# Altium PCB miniESP.PcbDoc
Units mm, origin at the board's own origin, x right, y up, seen from the top; angles counter-clockwise.
Board outline 26.67 x 37.46 mm, 2 copper layers (Top Layer, Bottom Layer); 16 components, 25 nets, 74 pads, 19 vias.
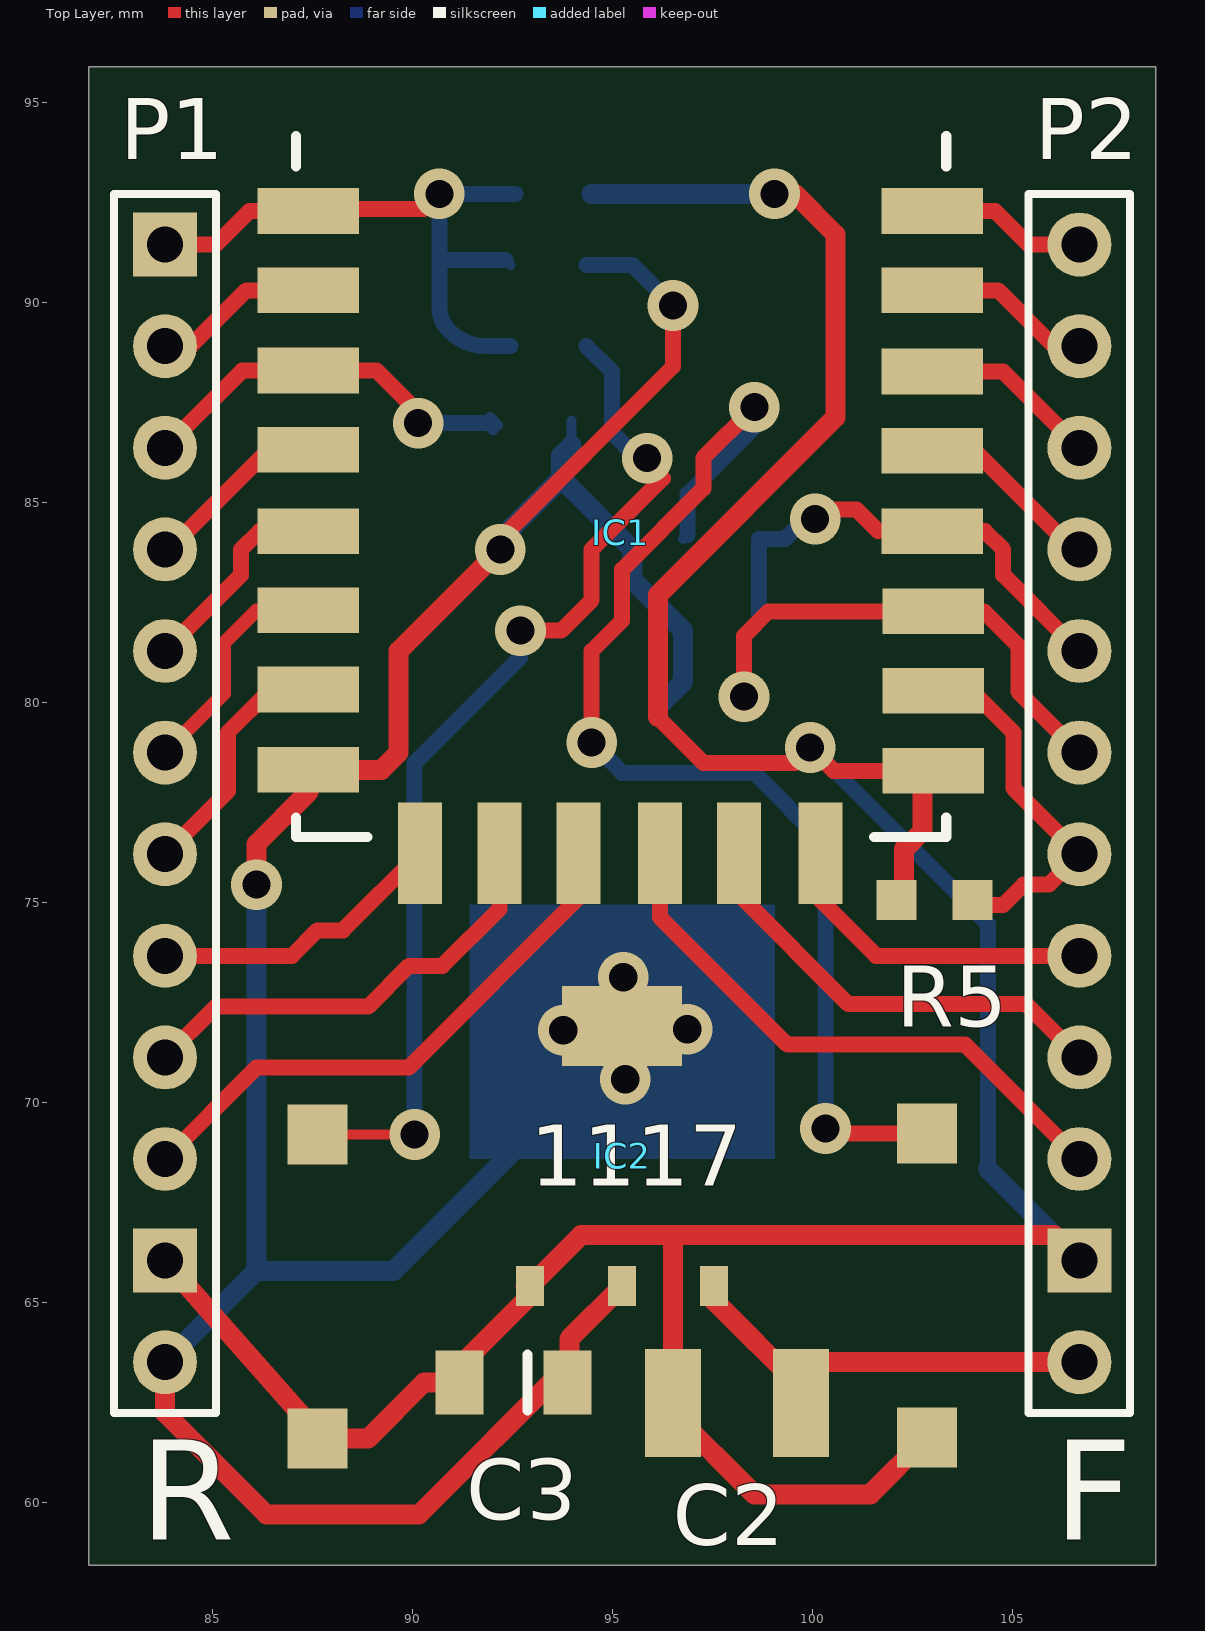
[diagram p0: Top Layer view]
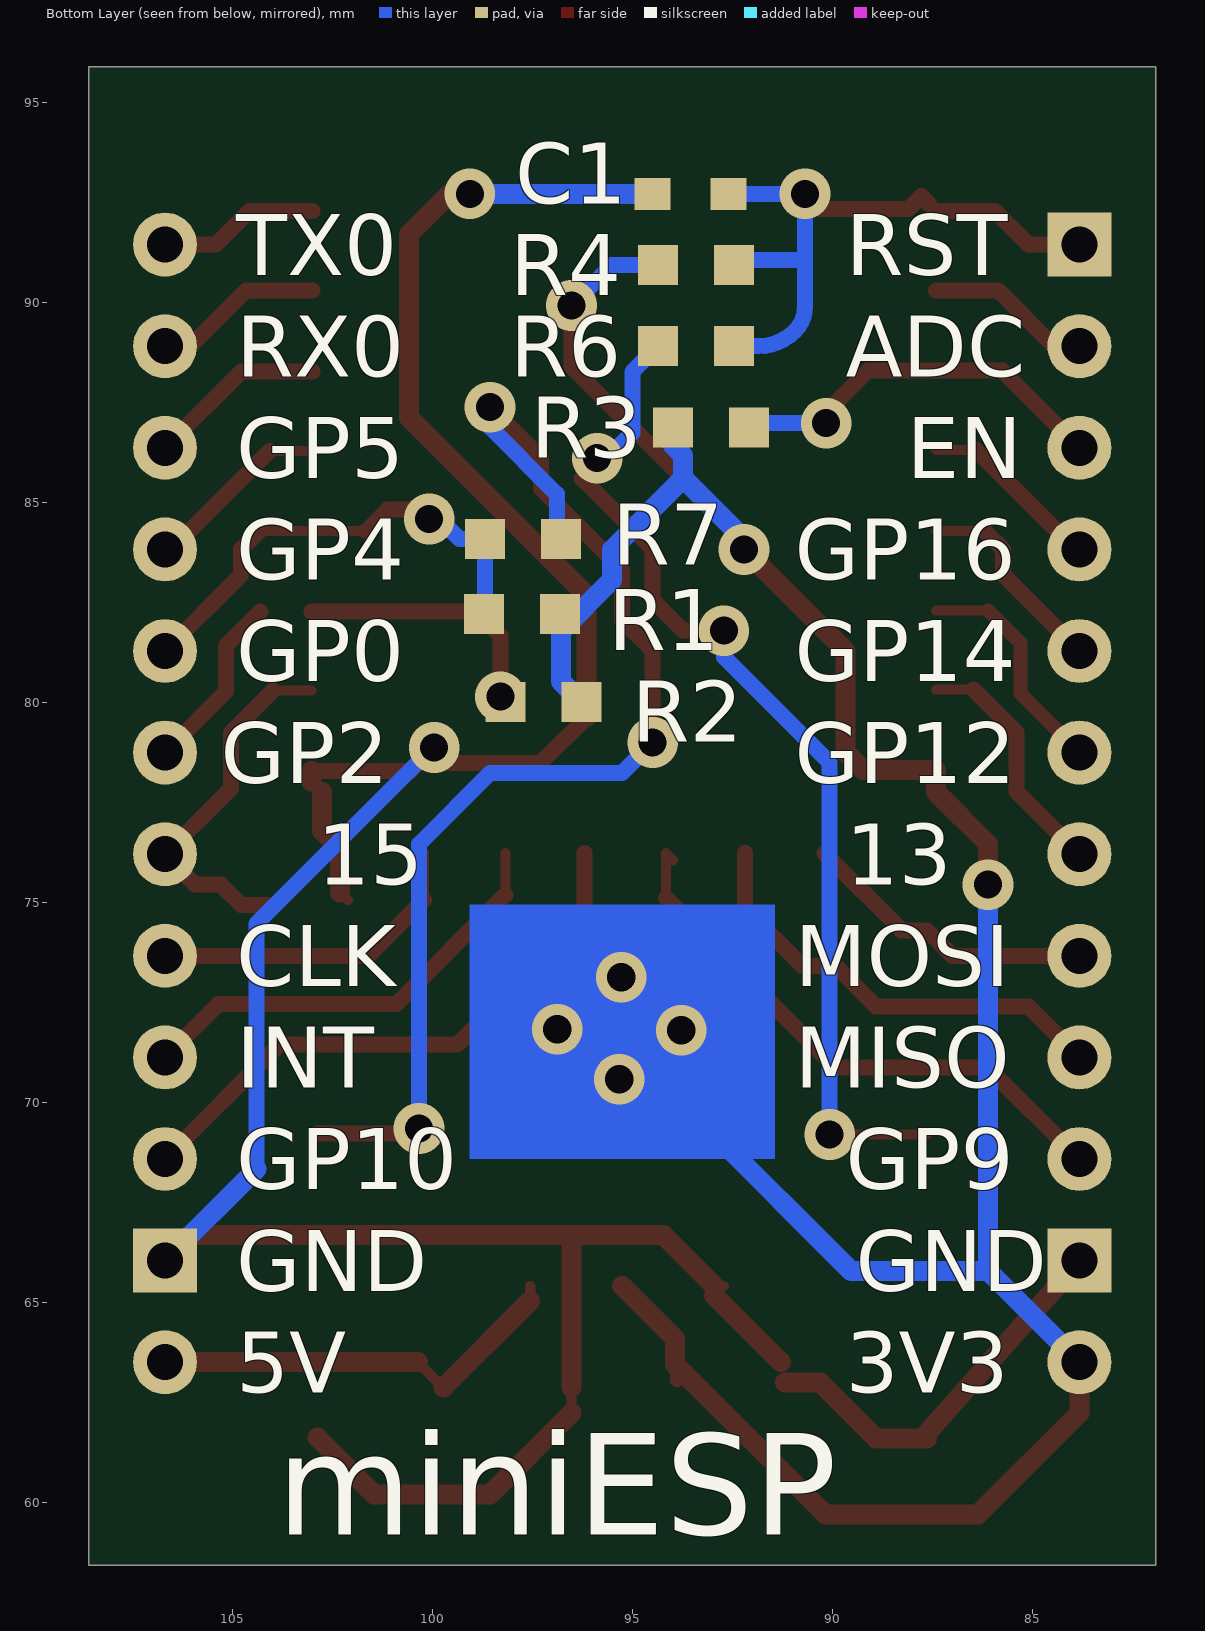
[diagram p1: Bottom Layer view, seen from below]
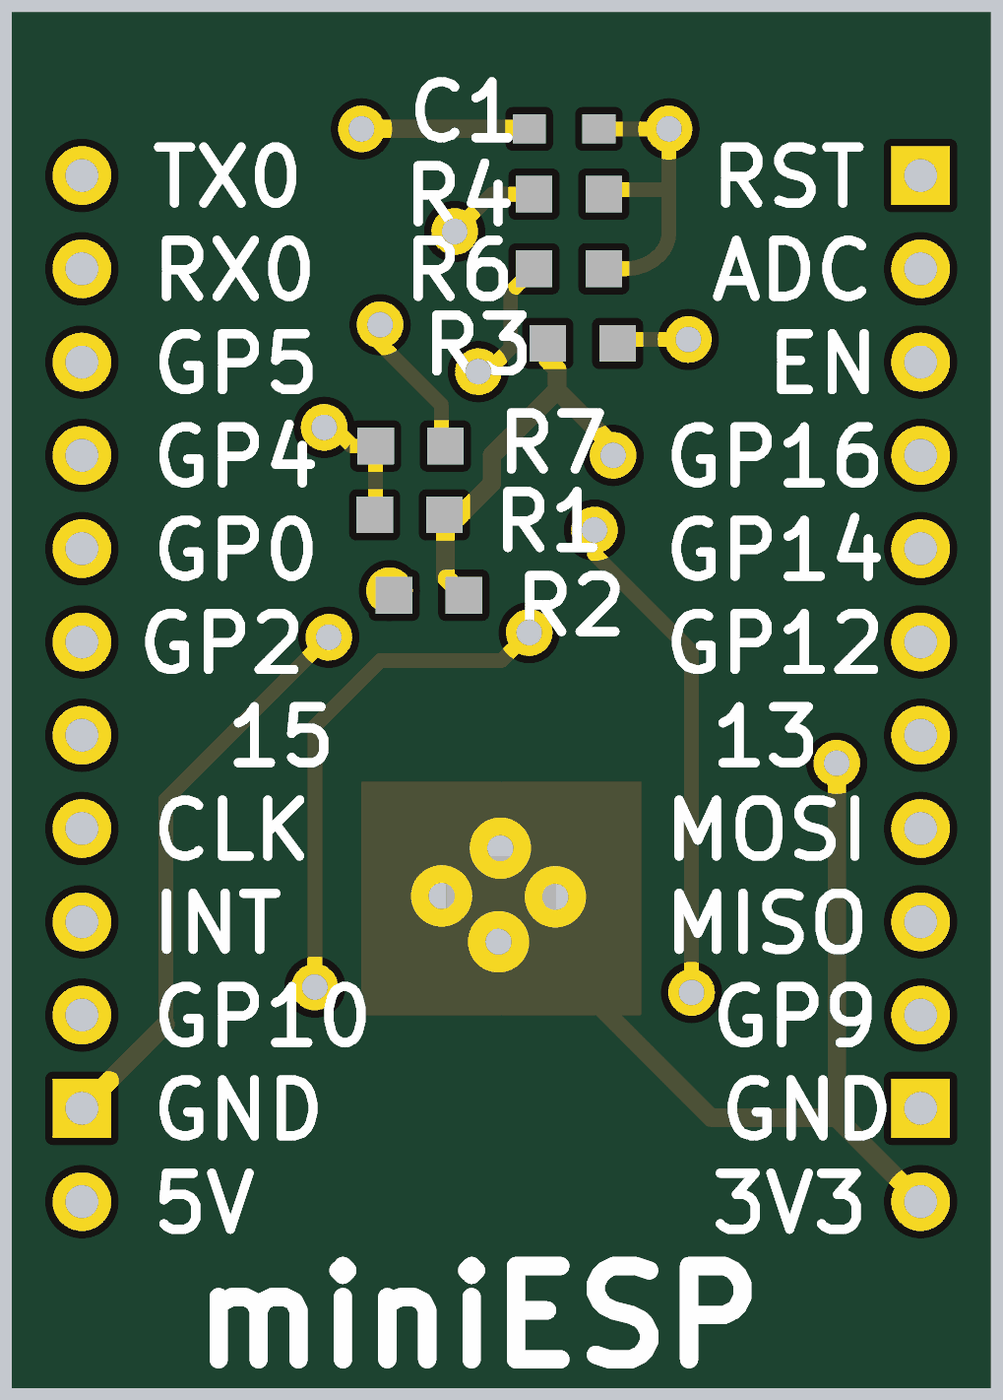
[diagram p2: 3D render of the assembled board from below, using the file's embedded part models]

## Layer stack, top to bottom
Top Solder: solder mask 0.0102, Solder Resist, Dk 3.5
Top Layer: signal copper 0.0356
Dielectric 1: dielectric 0.32, FR-4, Dk 4.8
Bottom Layer: signal copper 0.0356
Bottom Solder: solder mask 0.0102, Solder Resist, Dk 3.5

## Board outline
81.915,95.885 108.585,95.885 108.585,58.42 81.915,58.42

## Design rules (kind name [scope] priority, off if disabled: settings)
Clearance [All] p1: gap=0.25 ignorepadtopadclearanceinfootprint=FALSE
ComponentClearance [All] p1: gap=0.01 collisioncheckmode=3 verticalgap=0.01 showdistances=FALSE
PolygonConnect [All] p1: connectstyle=Relief reliefconductorwidth=0.254 reliefentries=4 polygonreliefangle="90 Angle" airgapwidth=0.254
RoutingVias [All] p1: holewidth=0.7 width=1.27 viastyle="Through Hole" minholewidth=0.3 minwidth=1.27 maxholewidth=1 maxwidth=1.27
ShortCircuit [All] p1: allowed=TRUE
SolderMaskExpansion [All] p1: expansion=0.2
UnRoutedNet [All] p1: checkbadconnections=TRUE
Width [All] p1: maxlimit=1 minlimit=0.2 preferedwidth=0.4
27 further rules are at their usual default settings.

## Classes and differential pairs
component class miniESP: C1 C2 C3 F IC2 P1 P2 R R1 R2 R3 R4 R5 R6 R7

## Components (designator, comment, footprint, x,y, rotation, side; value= is the part's Value field where it differs from the comment)
C1 "Cap" C0603 92.088,93.21 r0 bottom value=100nF
C2 "Cap" C1210 99.62,62.484 r180 top value=100nF
C3 "Cap Polar" "C_POLAR A" 94.086,63.792 r180 top value=4,7uF
F "SWT-10/5" SWT-10/5 102.87,61.615 r90 top (schematic designator SW_FLASH1)
IC1 "ESP8266 ESP-12-E" "ESP8266 ESP-12-E RAW" 103.988,75.87 r0 top
IC2 "LD1117" LD1117 95.25,65.405 r0 top
P1 "Header 12" HDR1X12#1 83.82,91.44 r270 top
P2 "Header 12" HDR1X12#2 106.68,91.44 r270 top
R "SWT-10/5" SWT-10/5 87.63,61.595 r90 top (schematic designator SW_RST1)
R1 "Res" R0603 96.8,82.2 r0 bottom value=10k
R2 "Res" R0603 96.271,80.01 r0 bottom value=10k
R3 "Res" R0603 93.98,86.868 r180 bottom value=10k
R4 "Res" R0603 94.356,90.932 r180 bottom value=10k
R5 "Res" R0603 102.108,75.057 r0 top value=10k
R6 "Res" R0603 94.356,88.9 r180 bottom value=10k
R7 "Res" R0603 96.774,84.074 r0 bottom value=10k

## Footprints (in the part's own frame and the unit in brackets; to place one, negate y for a bottom-side part, rotate by r counter-clockwise, add the part's x,y. Pads: shape width x height; smd on the part's side, far side on the other; paste and mask are expansions set on the pad)
C0603 [mm]
  rect 0.9x0.8 smd: cap_1(0.5,0.5) cap_2(2.4,0.5)
C1210 [mm]
  rect 1.4x2.7 smd: cap_1(-0.1,0) cap_2(3.1,0)
  body extent 0.51,-1.4 2.54,1.4, height 2
"C_POLAR A" [mm]
  rect 1.2x1.6 smd: cap_polar_1(0.2,0.8) cap_polar_2(2.9,0.8)
  silkscreen extent 1.2,0.1 1.2,1.5, body extent 0,0 3.1,1.6, height 3
"ESP8266 ESP-12-E RAW" [mil] "ESP8266 ESP-12-E"
  rect 100x45 smd: 1(-653,646) 2(-653,568) 3(-653,489) 4(-653,411) 5(-653,331) 6(-653,253) 7(-653,175) 8(-653,96) 15(-38,95) 16(-38,174) 17(-38,252) 18(-39,331) 19(-39,410) 20(-39,488) 21(-39,568) 22(-39,646)
  rect 43.31x100 smd: 9(-543,14) 10(-465,14) 11(-387,14) 12(-307,14) 13(-229,14) 14(-149,14)
  silkscreen extent -665,30 -25,720, body extent -665,30 -25,775, height 118
HDR1X12#1 [mm] "Connector; Header; 12 Position"
  rect 1.6x1.6 hole 0.9: 1(0,0) 11(25.4,0)
  round 1.6 hole 0.9: 2(2.54,0) 3(5.08,0) 4(7.62,0) 5(10.16,0) 6(12.7,0) 7(15.24,0) 8(17.78,0) 9(20.32,0) 10(22.86,0) 12(27.94,0)
  silkscreen extent -1.27,-1.27 29.21,1.27
HDR1X12#2 [mm] "Connector; Header; 12 Position"
  round 1.6 hole 0.9: 1(0,0) 2(2.54,0) 3(5.08,0) 4(7.62,0) 5(10.16,0) 6(12.7,0) 7(15.24,0) 8(17.78,0) 9(20.32,0) 10(22.86,0) 12(27.94,0)
  rect 1.6x1.6 hole 0.9: 11(25.4,0)
  silkscreen extent -1.27,-1.27 29.21,1.27
LD1117 [mm]
  rect 0.7x1 smd: ld1117_gnd(-2.3,0) ld1117_vin(2.3,0) ld1117_vout(0,0)
  rect 3x2 smd: ld1117_vout(0,6.5)
  body extent -3.17,1.52 3.17,4.95, height 3
R0603 [mm]
  rect 1x1 smd: res_1(0,0) res_2(1.9,0)
  body extent 0,-0.51 1.91,0.51, height 1
SWT-10/5 [mm]
  rect 1.5x1.5 smd: 3(0,0) 4(7.6,0)
  body extent 0.76,-1.27 6.86,1.27, height 7

## Part data
P1 P2: "Header, 12-Pin", LatestRevisionDate=17-Jul-2002, LatestRevisionNote="Re-released for DXP Platform.", Publisher="Altium Limited"

## Via types
v1: diameter 1.27, hole 0.7, Top Layer to Bottom Layer, 15 vias
v2: diameter 1.27, hole 0.711, Top Layer to Bottom Layer, 4 vias

## Nets (pads, with @x,y where several pads share a name; then routed paths per layer and width w, separated by ;. In a path a pad name is that pad's centre, name@x,y a point inside that pad or via, vN(x,y) a via of type N, cw(c..) or ccw(c..) an arc to the next point about the centre after c; other vN are vias at no path point)
3V3: C3.cap_polar_1 IC1.8 IC2.ld1117_vout P1.12 R1.res_1 R2.res_1 R3.res_1 R4.res_1 | length 72
  Top Layer w0.25: v1(92.202,83.82) v1@92.202,84.074 ; C3.cap_polar_1 93.929,63.035 C3.cap_polar_1@93.929,63.449
  Top Layer w0.4: v1@92.202,84.074 96.52,88.392 v1(96.52,89.916)
  Top Layer w0.5: P1.12 83.82,62.23 86.36,59.69 90.17,59.69 93.929,63.449 93.929,64.084 IC2.ld1117_vout@95.25,65.405 ; v1(86.106,75.438) 86.106,76.454 87.401,77.749 IC1.8 89.23,78.308 89.662,78.74 89.662,81.28 v1(92.202,83.82)
  Bottom Layer w0.254: v1(92.202,83.82) v1@92.202,84.074 ; R3.res_1@93.98,86.416 R3.res_1 R3.res_1@93.98,87.035
  Bottom Layer w0.4: R4.res_1 95.504,90.932 v1(96.52,89.916) ; 97.155,73.279 97.409,73.279
  Bottom Layer w0.5: P1.12 86.106,65.786 ; v1(86.106,75.438) 86.106,65.786 ; v1@92.202,84.074 93.726,85.598 ; 93.091,69.342 89.535,65.786 86.106,65.786 ; R3.res_1@93.98,86.416 93.726,86.162 93.726,85.598 ; R2.res_1 96.774,80.513 96.774,81.788 95.504,83.058 95.504,83.82 93.726,85.598
  other v2: 95.325,70.575 93.775,71.8 96.875,71.825 95.275,73.125
5V: C2.cap_1 IC2.ld1117_vin P2.12 | length 10.7
  Top Layer w0.254: IC2.ld1117_vin@97.55,65.035 IC2.ld1117_vin ; C2.cap_1@99.72,62.865 C2.cap_1@100.355,63.5
  Top Layer w0.5: IC2.ld1117_vin@97.55,65.035 C2.cap_1@99.72,62.865 ; C2.cap_1@100.355,63.5 P2.12
ADC: IC1.2 P1.2 | length 4.2
  Top Layer w0.254: P1.2 P1.2@84.455,88.9
  Top Layer w0.4: P1.2@84.455,88.9 85.852,90.297 IC1.2
EN: IC1.3 P1.3 R3.res_2 | length 10.6
  Top Layer w0.254: v1(90.15,86.975) v1@90.425,86.975
  Top Layer w0.4: P1.3 85.75,88.29 IC1.3 89.11,88.29 v1@90.425,86.975
  Bottom Layer w0.254: R3.res_2@91.837,86.975 92.012,86.8 R3.res_2 92.141,86.929 R3.res_2@91.948,87.122
  Bottom Layer w0.4: v1(90.15,86.975) R3.res_2@91.837,86.975
GND: C1.cap_2 C2.cap_2 C3.cap_polar_2 F.3 IC1.15 IC2.ld1117_gnd P1.11 P2.11 R5.res_1 R.3 | length 86.5
  Top Layer w0.254: IC2.ld1117_gnd@92.71,65.405 IC2.ld1117_gnd IC2.ld1117_gnd@92.95,65.17 ; C2.cap_2@96.52,62.23 C2.cap_2 C2.cap_2@96.52,62.865 ; v1(99.06,92.71) v1@99.568,92.71 ; R5.res_1@102.113,75.057 R5.res_1@102.3,75.244 ; P2.11@106.172,66.548 P2.11
  Top Layer w0.4: 96.139,79.629 97.282,78.486 99.568,78.486 v1(99.949,78.867) 100.533,78.283 IC1.15
  Top Layer w0.5: P1.11 R.3@87.63,61.722 ; R.3 88.9,61.595 90.297,62.992 C3.cap_polar_2 ; C3.cap_polar_2@91.28,63.5 IC2.ld1117_gnd@92.95,65.17 ; IC2.ld1117_gnd 94.22,66.675 96.52,66.675 ; 96.139,79.629 96.139,82.677 100.584,87.122 100.584,91.694 v1@99.568,92.71 ; C2.cap_2@96.52,62.23 98.552,60.198 101.453,60.198 F.3 ; C2.cap_2@96.52,62.865 96.52,66.675 ; R5.res_1@102.3,75.244 102.3,76.325 102.757,76.782 IC1.15@102.757,77.753 ; IC1.15@103.022,78.018 IC1.15 ; P2.11@106.172,66.548 106.045,66.675 96.52,66.675
  Bottom Layer w0.4: v1(99.949,78.867) 99.983,78.867 104.394,74.456 104.394,68.326
  Bottom Layer w0.5: C1.cap_2 v1(99.06,92.71) ; 104.394,68.326 P2.11
GPIO0: IC1.18 P2.5 R1.res_2 R7.res_2 | length 12.3
  Top Layer w0.254: v1(100.076,84.582) 100.076,84.879 v1@100.141,84.814 ; 101.651,84.277 IC1.18 104.318,84.277
  Top Layer w0.4: v1@100.141,84.814 101.114,84.814 101.651,84.277 ; 104.318,84.277 104.775,83.82 104.775,83.185 P2.5
  Bottom Layer w0.254: v1@99.822,84.582 v1(100.076,84.582)
  Bottom Layer w0.4: R1.res_2 98.674,82.2 R7.res_2 99.314,84.074 v1@99.822,84.582
GPIO2: IC1.17 P2.6 R2.res_2 | length 11.7
  Top Layer w0.4: v1(98.298,80.137) 98.298,81.661 98.908,82.271 IC1.17 ; IC1.17@104.292,82.271 105.156,81.407 105.156,80.264 P2.6
  Bottom Layer w0.254: v1(98.298,80.137) 98.669,80.137 R2.res_2@98.467,79.935
GPIO4: IC1.19 P2.4 | length 4.7
  Top Layer w0.254: IC1.19 IC1.19@104.064,86.284 ; P2.4@106.528,83.82 P2.4
  Top Layer w0.4: IC1.19@104.064,86.284 P2.4@106.528,83.82
GPIO5: IC1.20 P2.3 | length 4.5
  Top Layer w0.4: IC1.20 104.775,88.265 P2.3
GPIO9: IC1.11 P1.10 | length 14.4
  Top Layer w0.254: IC1.11@93.98,76.048 IC1.11 IC1.11@94.158,75.108
  Top Layer w0.4: P1.10 86.106,70.866 89.916,70.866 IC1.11@94.158,75.108
GPIO10: IC1.12 P2.10 | length 14.6
  Top Layer w0.4: IC1.12 96.19,74.625 99.377,71.438 103.822,71.438 P2.10
GPIO12: IC1.6 P1.6 | length 5.8
  Top Layer w0.254: 86.106,82.296 IC1.6
  Top Layer w0.35: P1.6 85.293,80.213 85.293,81.483 86.106,82.296
GPIO13: IC1.7 P1.7 | length 6.1
  Top Layer w0.254: IC1.7@86.462,80.315 IC1.7
  Top Layer w0.4: P1.7 85.395,77.775 85.395,79.248 IC1.7@86.462,80.315
GPIO14: IC1.5 P1.5 | length 5.3
  Top Layer w0.254: P1.5 P1.5@84,81.46 ; P1.5@84,81.34 P1.5@84,81.46 ; P1.5@84,81.474 P1.5@84,81.46 ; IC1.5@86.182,84.277 IC1.5
  Top Layer w0.4: P1.5@84,81.46 85.725,83.185 85.725,83.82 IC1.5@86.182,84.277
GPIO15: IC1.16 P2.7 R5.res_2 | length 9.2
  Top Layer w0.254: IC1.16 IC1.16@103.988,80.289
  Top Layer w0.4: IC1.16@103.988,80.289 105.029,79.248 105.029,77.851 P2.7 105.918,75.438 105.283,75.438 104.775,74.93 R5.res_2@104.14,74.93
GPIO16: IC1.4 P1.4 | length 5
  Top Layer w0.254: P1.4 P1.4@83.922,83.82 ; P1.4@84,83.88 P1.4@84.38,83.88 ; IC1.4@86.411,86.309 IC1.4
  Top Layer w0.4: P1.4@83.922,83.82 IC1.4@86.411,86.309
NetR6_res_1: R6.res_1 R.4 | length 26.2
  Top Layer w0.254: R.4 v1(90.063,69.195) ; v1@95.875,85.989 v1(95.875,86.1)
  Top Layer w0.4: v1(92.71,81.788) 93.726,81.788 94.488,82.55 94.488,83.82 96.266,85.598 v1@95.875,85.989
  Bottom Layer w0.254: v1(90.063,69.195) v1@90.063,69.489 ; v1@95.632,86.1 v1(95.875,86.1)
  Bottom Layer w0.4: v1@90.063,69.489 90.063,78.486 92.71,81.133 v1(92.71,81.788) ; R6.res_1 94.996,88.26 94.996,86.736 v1@95.632,86.1
NetR7_res_1: F.4 R7.res_1 | length 30.7
  Top Layer w0.254: v1(100.33,69.342) v1@100.457,69.215
  Top Layer w0.4: v1(94.488,78.994) 94.488,81.28 95.25,82.042 95.25,83.312 97.282,85.344 97.282,86.106 v1(98.552,87.376) ; v1@100.457,69.215 F.4
  Bottom Layer w0.25: R7.res_1 R7.res_1@96.885,84.185 ; v1@98.552,86.868 v1(98.552,87.376)
  Bottom Layer w0.4: v1(94.488,78.994) 95.25,78.232 98.552,78.232 100.33,76.454 v1(100.33,69.342) ; R7.res_1@96.885,84.185 96.885,85.201 v1@98.552,86.868
nRST: C1.cap_1 IC1.1 P1.1 R4.res_2 R6.res_2 | length 16.5
  Top Layer w0.254: IC1.1 IC1.1@87.579,92.456
  Top Layer w0.4: P1.1 85.09,91.44 85.928,92.278 IC1.1 ; IC1.1@87.579,92.456 87.773,92.65 88.094,92.329 90.297,92.329 v1(90.678,92.71)
  Bottom Layer w0.25: R4.res_2@92.329,91.059 R4.res_2
  Bottom Layer w0.4: R4.res_2@92.329,91.059 90.678,91.059 ; R6.res_2 91.852,88.9 cw(c91.852,90.201) 90.932,89.281 cw(c91.545,89.894) 90.678,89.894 90.678,91.059 ; C1.cap_1 v1(90.678,92.71) 90.678,91.059
RXD0: IC1.21 P2.2 | length 4.3
  Top Layer w0.254: P2.2@106.045,88.9 P2.2
  Top Layer w0.4: IC1.21 104.648,90.297 P2.2@106.045,88.9
SPI_CLK: IC1.14 P2.8 | length 8.2
  Top Layer w0.254: IC1.14@100.203,75.057 IC1.14
  Top Layer w0.4: IC1.14@100.203,75.057 101.6,73.66 P2.8
SPI_INT: IC1.13 P2.9 | length 11.2
  Top Layer w0.254: IC1.13@98.171,75.184 IC1.13
  Top Layer w0.4: IC1.13@98.171,75.184 100.901,72.453 105.347,72.453 P2.9
SPI_MISO: IC1.10 P1.9 | length 11.3
  Top Layer w0.4: P1.9 85.09,72.39 88.9,72.39 89.916,73.406 90.754,73.406 92.177,74.828 IC1.10
SPI_MOSI: IC1.9 P1.8 | length 7.4
  Top Layer w0.4: P1.8 86.995,73.66 87.63,74.295 88.265,74.295 IC1.9
TXD0: IC1.22 P2.1 | length 4
  Top Layer w0.4: IC1.22 104.572,92.278 105.41,91.44 P2.1

## Other copper
Bottom Layer:
  region net 3V3: 99.06,74.93 91.44,74.93 91.44,68.58 99.06,68.58

## Silkscreen, mask and mechanical layers (free items; w line width, h text height)
Bottom Overlay:
  text "RST" at 89.662,90.678 h1.52
  text "TX0" at 104.902,90.678 h1.52
  text "ADC" at 89.662,88.138 h1.52
  text "RX0" at 104.902,88.138 h1.52
  text "EN" at 88.138,85.598 h1.52
  text "GP5" at 104.902,85.598 h1.52
  text "GP16" at 90.932,83.058 h1.52
  text "GP4" at 104.902,83.058 h1.52
  text "GP14" at 90.932,80.518 h1.52
  text "GP0" at 104.902,80.518 h1.52
  text "GP12" at 90.932,77.978 h1.52
  text "GP2" at 105.283,77.978 h1.52
  text "13" at 89.662,75.438 h1.52
  text "15" at 102.87,75.438 h1.52
  text "MOSI" at 90.932,72.898 h1.52
  text "CLK" at 104.902,72.898 h1.52
  text "MISO" at 90.932,70.358 h1.52
  text "INT" at 104.902,70.358 h1.52
  text "GP9" at 89.662,67.818 h1.52
  text "GP10" at 104.902,67.818 h1.52
  text "GND" at 89.408,65.278 h1.52
  text "GND" at 104.902,65.278 h1.52
  text "3V3" at 89.662,62.738 h1.52
  text "5V" at 104.902,62.738 h1.52
  text "miniESP" at 103.886,59.182 h2.54

## Text inside footprints (layer, text, board x,y; h text height)
IC2: Top Overlay "1117" at 92.95,67.905 h1.52